# Altium PCB PCB1.PcbDoc
Units mm, origin at the board's own origin, x right, y up, seen from the top; angles counter-clockwise.
Board outline 40.39 x 35.48 mm, 2 copper layers (Top Layer, Bottom Layer); 9 components, 6 nets, 27 pads, 2 vias.
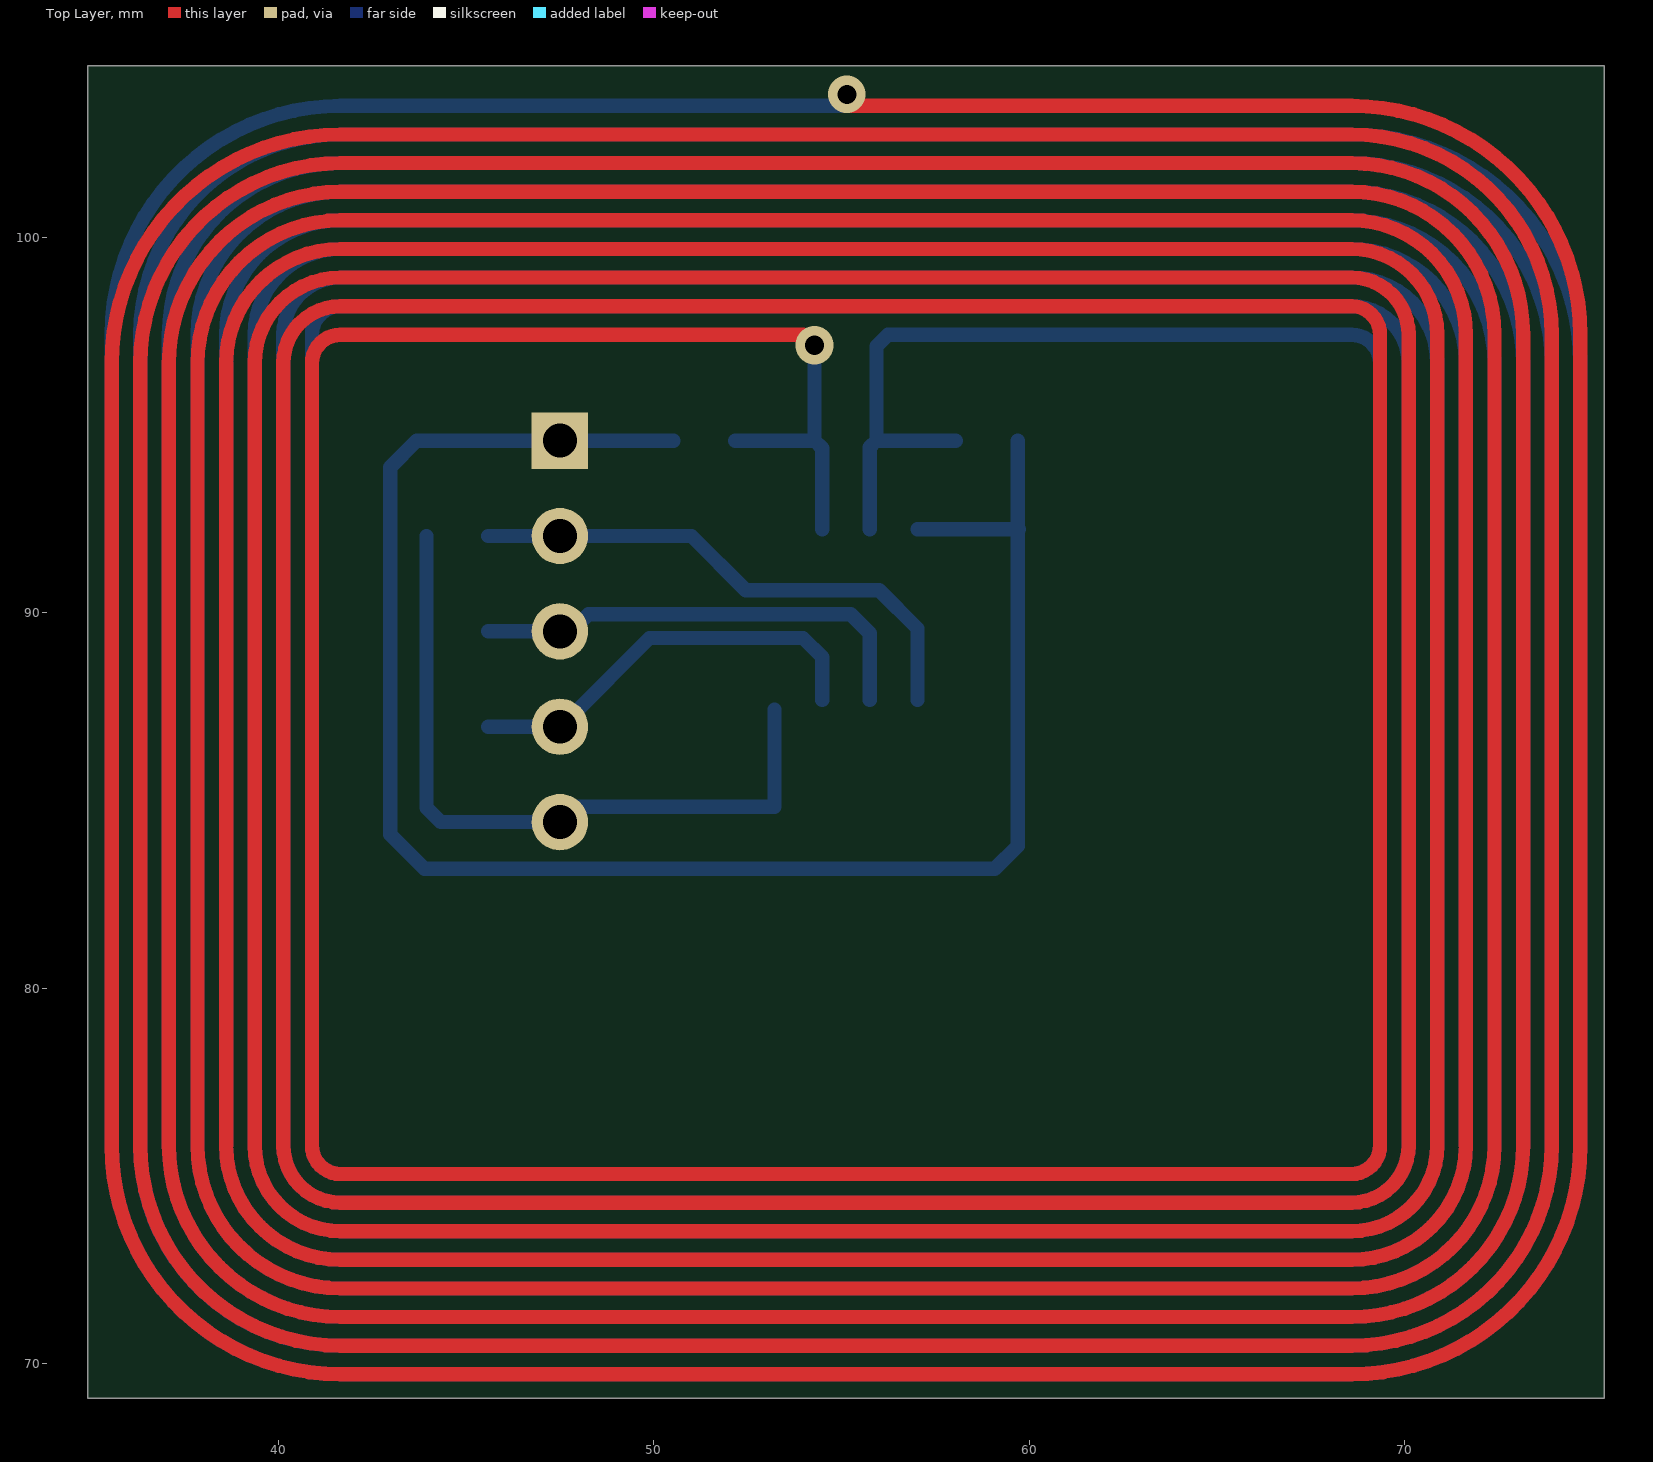
[diagram p0: Top Layer view]
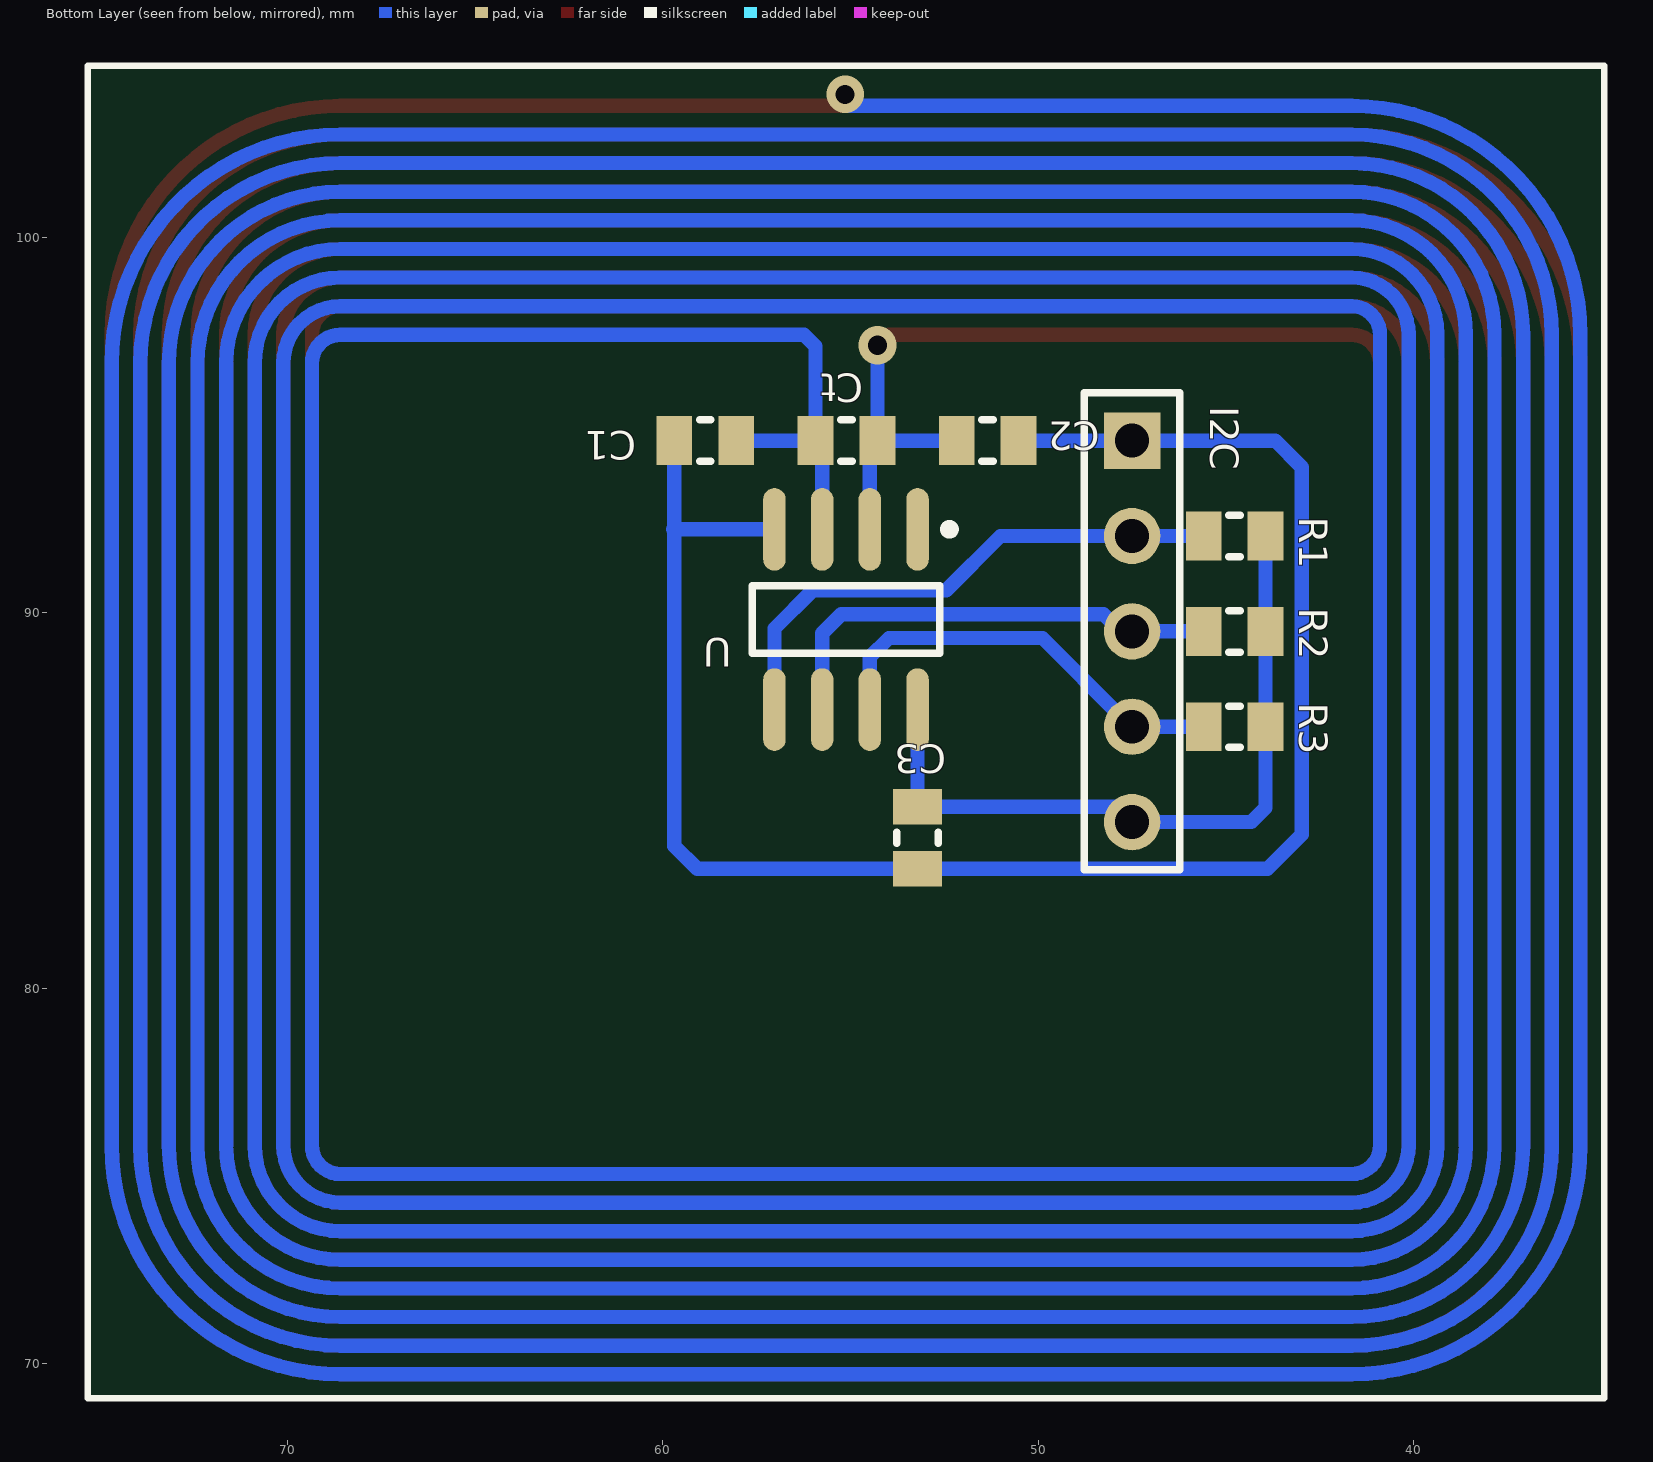
[diagram p1: Bottom Layer view, seen from below]
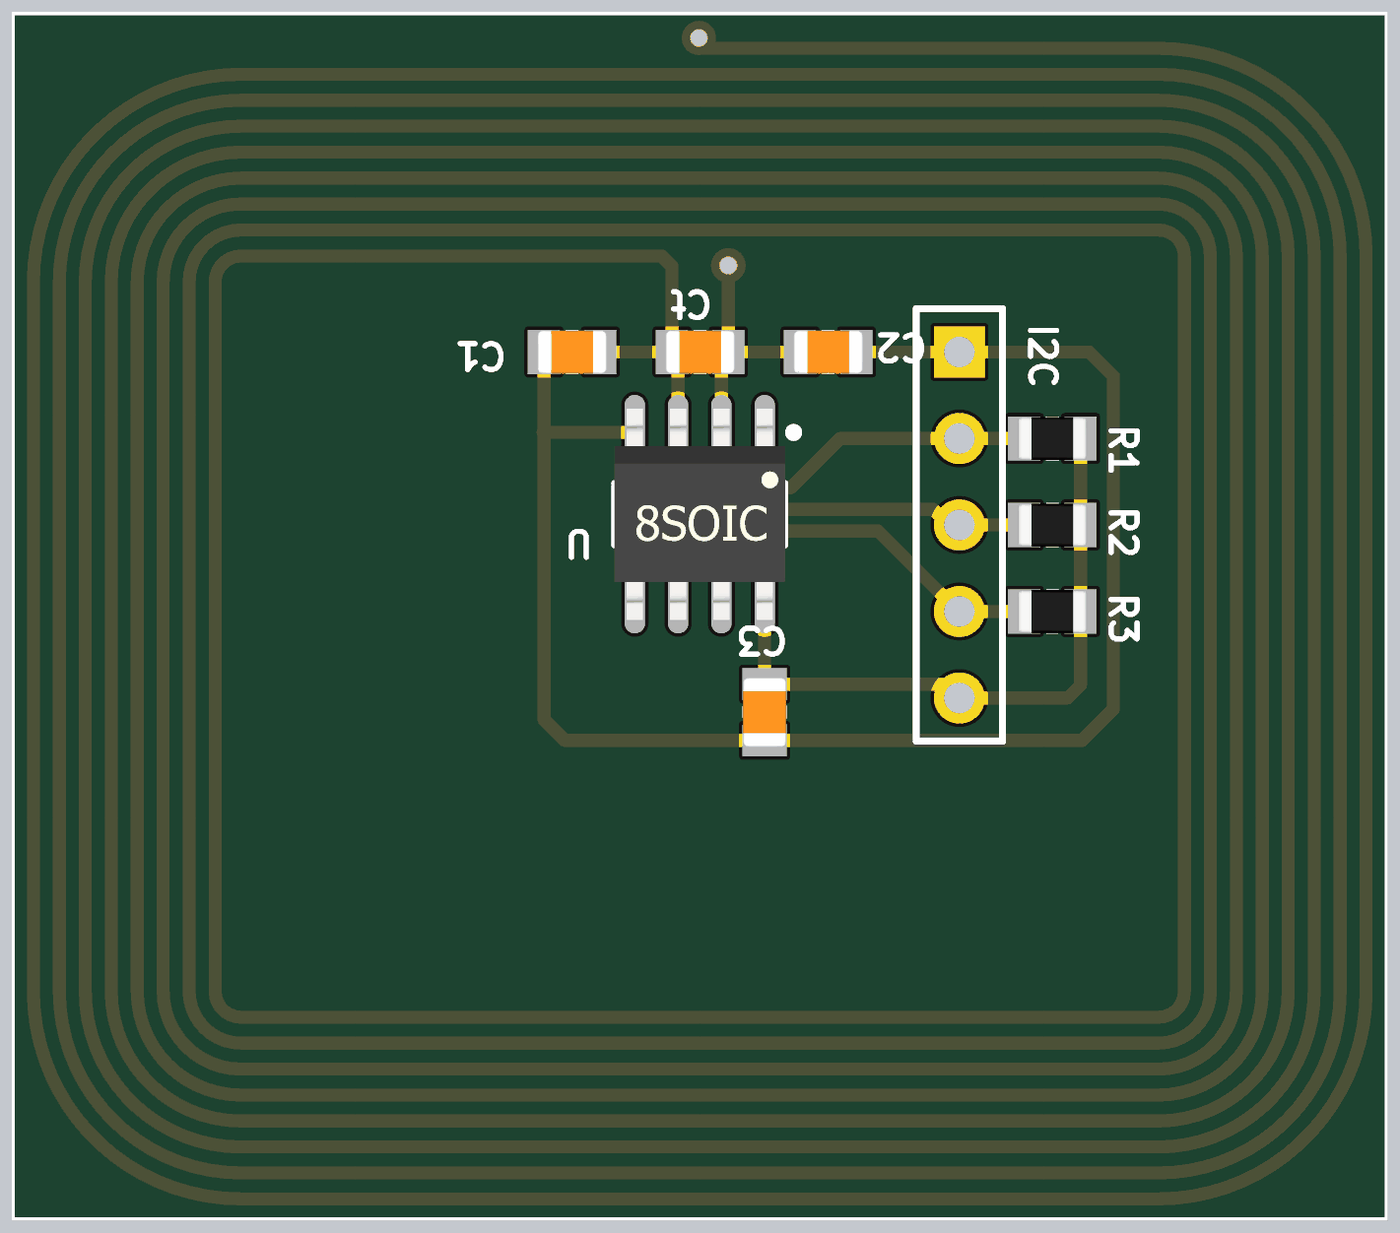
[diagram p2: 3D render of the assembled board from below, using the file's embedded part models]

## Layer stack, top to bottom
Top Solder: solder mask 0.0102, Solder Resist, Dk 3.5
Top Layer: signal copper 0.0356
Dielectric 1: dielectric 0.32, FR-4, Dk 4.8
Bottom Layer: signal copper 0.0356
Bottom Solder: solder mask 0.0102, Solder Resist, Dk 3.5

## Board outline
34.925,69.088 34.925,104.572 75.311,104.572 75.311,69.088

## Design rules (kind name [scope] priority, off if disabled: settings)
Clearance [All] p1: gap=0.2 ignorepadtopadclearanceinfootprint=FALSE except(0: Arc-Hole Track-Hole SMDPad-Hole THPad-Hole Via-Hole Fill-Hole Poly-Hole Region-Hole Text-Hole)
PolygonConnect [All] p1: connectstyle=Relief reliefconductorwidth=0.254 reliefentries=4 polygonreliefangle="90 Angle" airgapwidth=0.254
RoutingVias [All] p1: holewidth=0.711 width=1.27 viastyle="Through Hole" minholewidth=0.4 minwidth=0.8 maxholewidth=0.711 maxwidth=1.27
SolderMaskExpansion [All] p1: expansion=0.102 istentingtop=FALSE
Width [All] p1: maxlimit=0.762 minlimit=0.2 preferedwidth=0.508
30 further rules are at their usual default settings.

## Components (designator, comment, footprint, x,y, rotation, side; value= is the part's Value field where it differs from the comment)
C1 "100nF" SMD_CAP_0805 58.039,94.59 r0 bottom
C2 "100nF" SMD_CAP_0805 50.522,94.59 r0 bottom
C3 "1uF" SMD_CAP_0805 53.213,84.836 r270 bottom
Ct "100nF" SMD_CAP_0805 55.931,94.59 r180 bottom
I2C "Header 5" HDR1X5 47.498,94.59 r270 bottom
R1 "4.7K" "RES 0805 (2012X06L)" 45.593,92.05 r180 bottom
R2 "4.7K" "RES 0805 (2012X06L)" 45.593,89.51 r180 bottom
R3 "4.7K" "RES 0805 (2012X06L)" 45.593,86.97 r180 bottom
U "ST25DV04K" PCBComponent_1 55.118,89.827 r270 bottom

## Footprints (in the part's own frame and the unit in brackets; to place one, negate y for a bottom-side part, rotate by r counter-clockwise, add the part's x,y. Pads: shape width x height; smd on the part's side, far side on the other; paste and mask are expansions set on the pad)
HDR1X5 [mm] "Connector; Header; 5 Position"
  rect 1.5x1.5 hole 0.9: 1(0,0)
  round 1.5 hole 0.9: 2(2.54,0) 3(5.08,0) 4(7.62,0) 5(10.16,0)
  silkscreen extent -1.27,-1.27 11.43,1.27
PCBComponent_1 [mm]
  oval 2.2x0.6 smd: 1(-2.4,1.905) 2(-2.4,0.635) 3(-2.4,-0.635) 4(-2.4,-1.905) 5(2.4,-1.905) 6(2.4,-0.635) 7(2.4,0.635) 8(2.4,1.905)
  silkscreen extent -2.52,-2.5 0.9,2.88, body extent -3.1,-2.5 3.1,2.5, height 1.93
"RES 0805 (2012X06L)" [mm] "Chip Resistor, 2-Leads, Body 2.0x1.3mm, IPC High Density _ (0.100 W)"
  rect 0.95x1.3 smd: 1(0,0) 2(1.65,0)
  silkscreen extent 0.67,-0.55 0.97,0.55, body extent -0.19,-0.63 1.84,0.64, height 0.6
SMD_CAP_0805 [mm]
  rect 0.95x1.3 smd: 1(0,0) 2(1.65,0)
  silkscreen extent 0.67,-0.55 0.97,0.55, body extent -0.19,-0.64 1.84,0.63, height 0.65

## Part data
C1 C2 C3 Ct: library part Cap-Bipolar, "Bipolar Capacitor", Voltage=100V, Adding Date=1387/12/20, Designer="Saeid Jorablo", Organazation=ControTec
I2C: "Header, 5-Pin", LatestRevisionDate=17-Jul-2002, LatestRevisionNote="Re-released for DXP Platform.", Publisher="Altium Limited"
R1 R2 R3: library part Resistor, "Resistor", Power="1/8 W", Tolerance=5%

## Via types
v1: diameter 1, hole 0.5, Top Layer to Bottom Layer, tented both sides, 1 vias
v2: diameter 1.016, hole 0.508, Top Layer to Bottom Layer, tented both sides, 1 vias

## Nets (pads, with @x,y where several pads share a name; then routed paths per layer and width w, separated by ;. In a path a pad name is that pad's centre, name@x,y a point inside that pad or via, vN(x,y) a via of type N, cw(c..) or ccw(c..) an arc to the next point about the centre after c; other vN are vias at no path point)
3.3V: C3.1 I2C.5 R1.2 R2.2 R3.2 U.8 | length 19.4
  Bottom Layer w0.381: R1.2 43.943,84.81 44.323,84.43 I2C.5 47.904,84.836 C3.1 U.8
ANT: C1.1 C2.2 Ct.1 Ct.2 U.2 U.3 | length 1897.8
  Top Layer w0.381: v2(54.28,97.13) 54.28,97.104 53.975,97.409 41.656,97.409 ccw(c41.656,96.647) 40.894,96.647 40.894,75.819 ccw(c41.656,75.819) 41.656,75.057 68.58,75.057 ccw(c68.58,75.819) 69.342,75.819 69.342,97.409 ccw(c68.58,97.409) 68.58,98.171 41.656,98.171 ccw(c41.656,96.647) 40.132,96.647 40.132,75.819 ccw(c41.656,75.819) 41.656,74.295 68.58,74.295 ccw(c68.58,75.819) 70.104,75.819 70.104,97.409 ccw(c68.58,97.409) 68.58,98.933 41.656,98.933 ccw(c41.656,96.647) 39.37,96.647 39.37,75.819 ccw(c41.656,75.819) 41.656,73.533 68.58,73.533 ccw(c68.58,75.819) 70.866,75.819 70.866,97.409 ccw(c68.58,97.409) 68.58,99.695 41.656,99.695 ccw(c41.656,96.647) 38.608,96.647 38.608,75.819 ccw(c41.656,75.819) 41.656,72.771 68.58,72.771 ccw(c68.58,75.819) 71.628,75.819 71.628,97.409 ccw(c68.58,97.409) 68.58,100.457 41.656,100.457 ccw(c41.656,96.647) 37.846,96.647 37.846,75.819 ccw(c41.656,75.819) 41.656,72.009 68.58,72.009 ccw(c68.58,75.819) 72.39,75.819 72.39,97.409 ccw(c68.58,97.409) 68.58,101.219 41.656,101.219 ccw(c41.656,96.647) 37.084,96.647 37.084,75.819 ccw(c41.656,75.819) 41.656,71.247 68.58,71.247 ccw(c68.58,75.819) 73.152,75.819 73.152,97.409 ccw(c68.58,97.409) 68.58,101.981 41.656,101.981 ccw(c41.656,96.647) 36.322,96.647 36.322,75.819 ccw(c41.656,75.819) 41.656,70.485 68.58,70.485 ccw(c68.58,75.819) 73.914,75.819 73.914,97.409 ccw(c68.58,97.409) 68.58,102.743 41.656,102.743 ccw(c41.656,96.647) 35.56,96.647 35.56,75.819 ccw(c41.656,75.819) 41.656,69.723 68.58,69.723 ccw(c68.58,75.819) 74.676,75.819 74.676,97.409 ccw(c68.58,97.409) 68.58,103.505 v1@55.118,103.505
  Bottom Layer w0.381: C2.2 Ct.2 ; v2(54.28,97.13) v2(54.28,97.13) Ct.2 ; U.2 54.483,94.387 Ct.2 ; v1@55.118,103.505 41.656,103.505 ccw(c41.656,97.409) 35.56,97.409 35.56,75.819 ccw(c41.656,75.819) 41.656,69.723 68.58,69.723 ccw(c68.58,75.819) 74.676,75.819 74.676,96.647 ccw(c68.58,96.647) 68.58,102.743 41.656,102.743 ccw(c41.656,97.409) 36.322,97.409 36.322,75.794 ccw(c41.643,75.806) 41.656,70.485 68.58,70.485 ccw(c68.58,75.819) 73.914,75.819 73.914,96.647 ccw(c68.58,96.647) 68.58,101.981 41.656,101.981 ccw(c41.656,97.409) 37.084,97.409 37.084,75.819 ccw(c41.656,75.819) 41.656,71.247 68.58,71.247 ccw(c68.58,75.819) 73.152,75.819 73.152,96.647 ccw(c68.58,96.647) 68.58,101.219 41.656,101.219 ccw(c41.656,97.409) 37.846,97.409 37.846,75.819 ccw(c41.656,75.819) 41.656,72.009 68.58,72.009 ccw(c68.58,75.819) 72.39,75.819 72.39,96.647 ccw(c68.58,96.647) 68.58,100.457 41.656,100.457 ccw(c41.656,97.409) 38.608,97.409 38.608,75.819 ccw(c41.656,75.819) 41.656,72.771 68.58,72.771 ccw(c68.58,75.819) 71.628,75.819 71.628,96.647 ccw(c68.58,96.647) 68.58,99.695 41.656,99.695 ccw(c41.656,97.409) 39.37,97.409 39.37,75.819 ccw(c41.656,75.819) 41.656,73.533 68.58,73.533 ccw(c68.58,75.819) 70.866,75.819 70.866,96.647 ccw(c68.593,96.66) 68.605,98.933 41.656,98.933 ccw(c41.656,97.409) 40.132,97.409 40.132,75.819 ccw(c41.656,75.819) 41.656,74.295 68.58,74.295 ccw(c68.58,75.819) 70.104,75.819 70.104,96.647 ccw(c68.58,96.647) 68.58,98.171 41.656,98.171 ccw(c41.656,97.409) 40.894,97.409 40.894,75.819 ccw(c41.656,75.819) 41.656,75.057 68.58,75.057 ccw(c68.58,75.819) 69.342,75.819 69.342,96.647 ccw(c68.58,96.647) 68.58,97.409 56.236,97.409 55.931,97.104 Ct.1 ; U.3 55.753,94.412 Ct.1 ; C1.1 Ct.1
  other v1: 55.143,103.81
GND: C1.2 C2.1 C3.2 I2C.1 U.4 | length 48.4
  Bottom Layer w0.381: C2.1 I2C.1 43.688,94.59 42.977,93.878 42.977,84.099 43.891,83.185 59.08,83.185 59.689,83.794 C1.2 ; U.4 59.715,92.227
NFC_GPO: I2C.4 R3.1 U.7 | length 11.1
  Bottom Layer w0.381: R3.1 I2C.4 ; I2C.4@47.752,86.97 47.752,87.198 49.886,89.332 53.975,89.332 54.483,88.824 U.7@54.483,87.681
SCL: I2C.3 R2.1 U.6 | length 12.3
  Bottom Layer w0.381: R2.1 I2C.3 47.803,89.51 48.26,89.967 55.245,89.967 55.753,89.459 U.6@55.753,87.681
SDA: I2C.2 R1.1 U.5 | length 14.1
  Bottom Layer w0.381: R1.1 I2C.2 ; I2C.2@47.752,92.05 51.003,92.05 52.451,90.602 56.007,90.602 57.023,89.586 U.5@57.023,87.681
pads on no net: U.1

## Silkscreen, mask and mechanical layers (free items; w line width, h text height)
Bottom Overlay:
  the board outline again, w0.178